# Altium PCB IMU_ld.PcbDoc
Units mil, origin at the board's own origin, x right, y up, seen from the top; angles counter-clockwise.
Board outline 1180.03 x 1210.03 mil, 2 copper layers (Top Layer, Bottom Layer); 19 components, 13 nets, 99 pads, 45 vias.
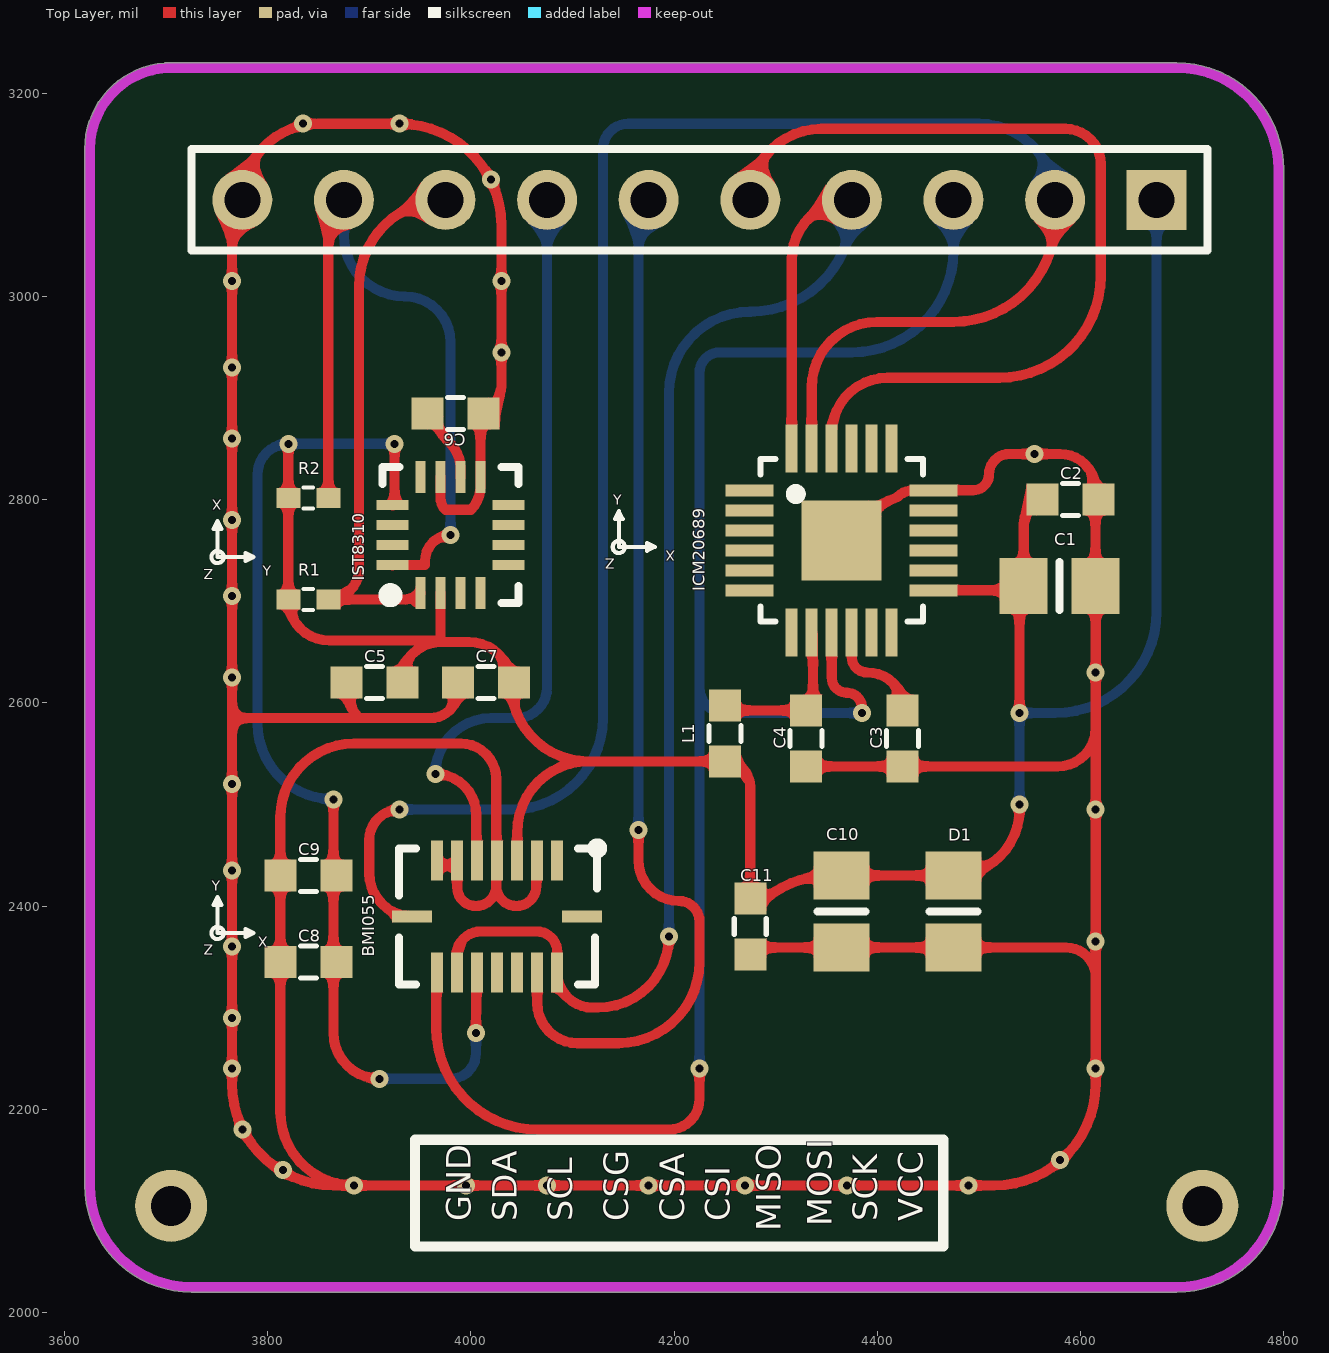
[diagram p0: Top Layer view]
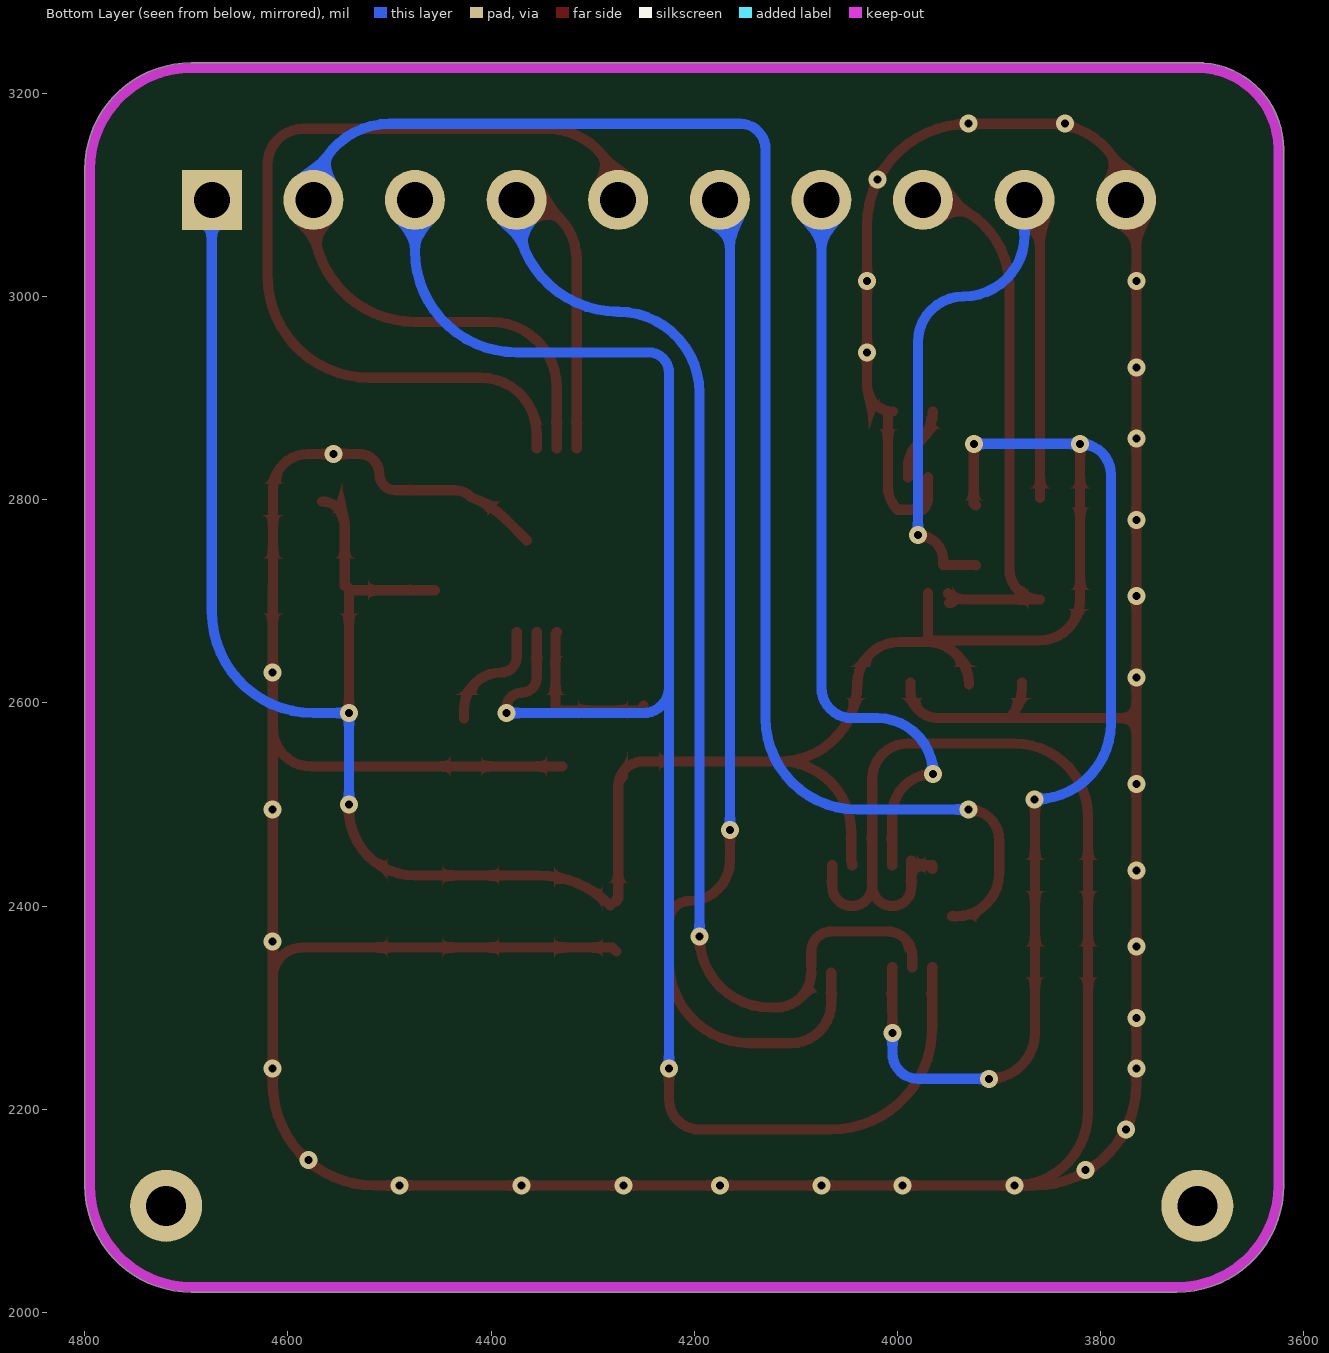
[diagram p1: Bottom Layer view, seen from below]
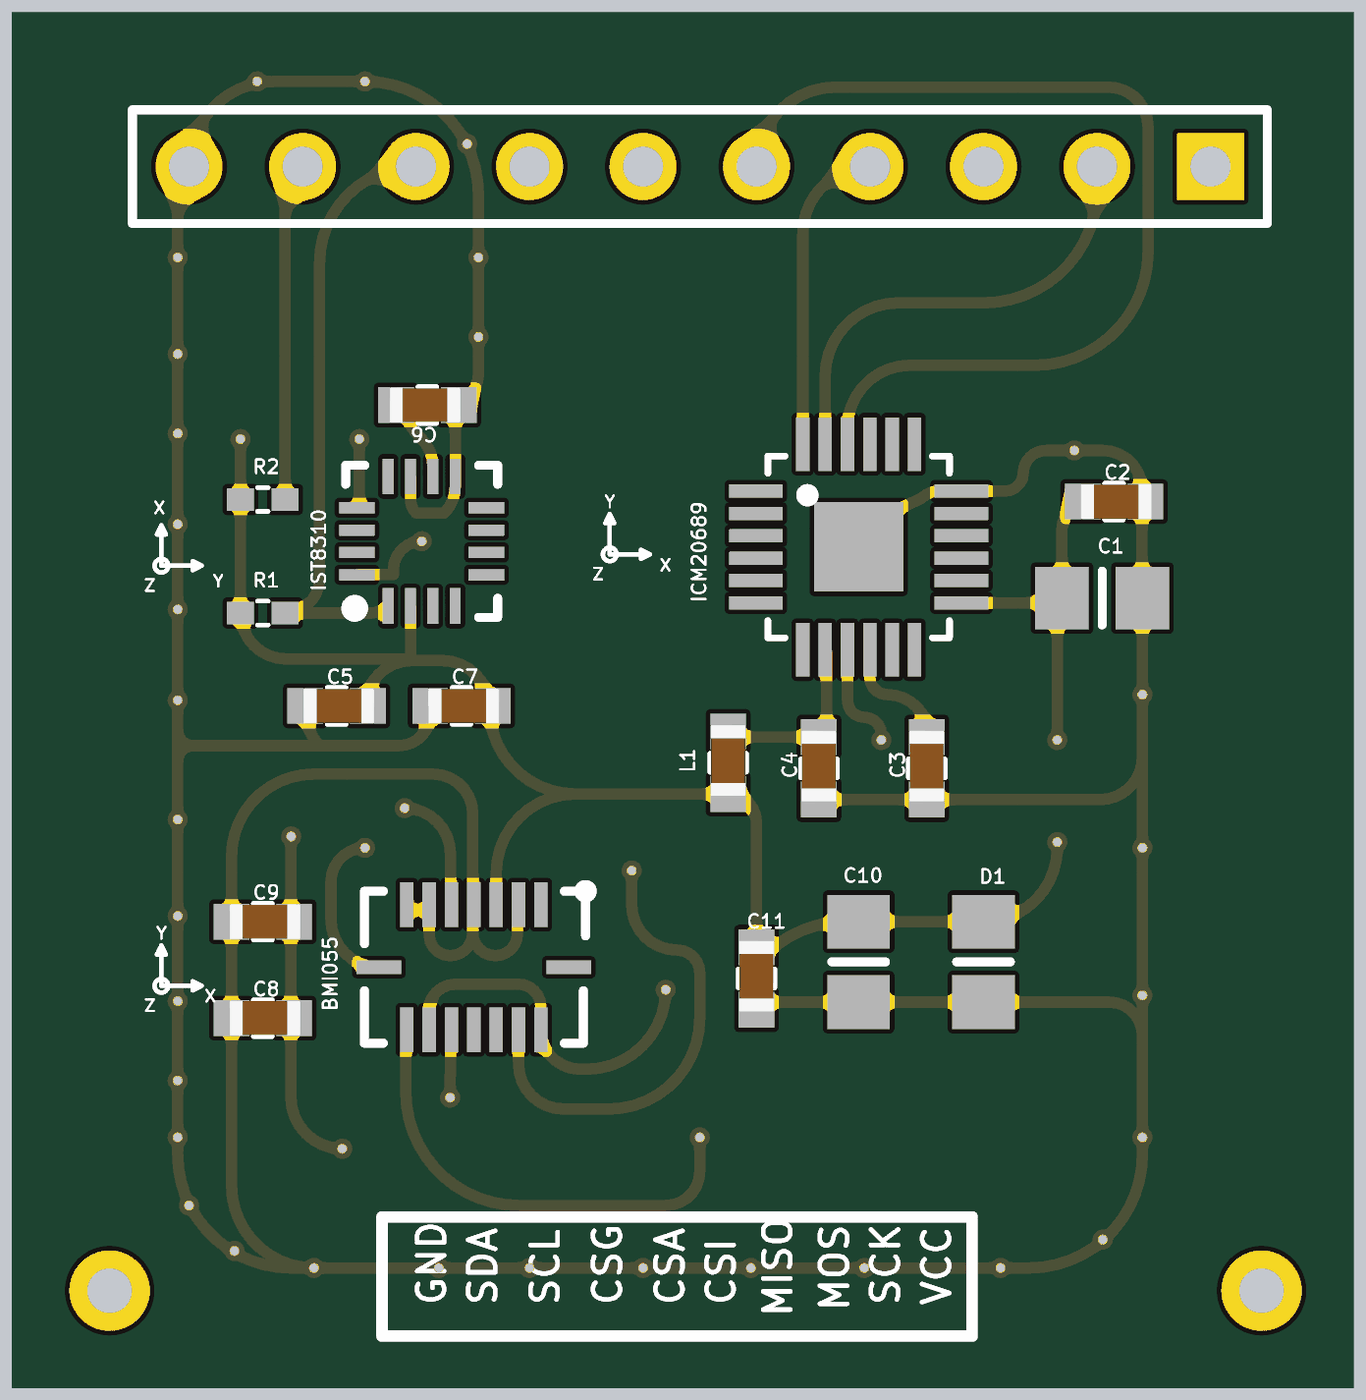
[diagram p2: 3D render of the assembled board from above, using the file's embedded part models]

## Layer stack, top to bottom
Top Solder: solder mask 0.4, Solder Resist, Dk 3.5
Top Layer: signal copper 1.4
Dielectric 1: dielectric 12.6, FR-4, Dk 4.8
Bottom Layer: signal copper 1.4
Bottom Solder: solder mask 0.4, Solder Resist, Dk 3.5

## Board outline
3619.99,2125 3619.99,3145 cw(c3705,3145) 3698.42,3229.76 cw(c3700,3225) 3700,3230.01 4695,3230.01 cw(c4695,3125) 4800.02,3125 4800.02,2125 cw(c4695,2125) 4695,2019.98 3725,2019.98 cw(c3725,2125)

## Design rules (kind name [scope] priority, off if disabled: settings)
Clearance [All] p1: gap=7
PolygonConnect [All] p1: connectstyle=Relief reliefconductorwidth=10 reliefentries=4 polygonreliefangle="90 Angle" airgapwidth=10
RoutingVias [All] p1: holewidth=28 width=50 viastyle="Through Hole" minholewidth=28 minwidth=50 maxholewidth=28 maxwidth=50
SolderMaskExpansion [All] p1: expansion=4
Width [All] p1: maxlimit=10 minlimit=10 preferedwidth=10
30 further rules are at their usual default settings.

## Components (designator, comment, footprint, x,y, rotation, side; value= is the part's Value field where it differs from the comment)
BMI055 "BMI-055" BMI055 4025.94,2389.88 r0 top
C1 "" 0805-CAP 4574.57,2800 r0 top
C2 "" 0603-CAP 4590,2800 r0 top
C3 "" 0603-CAP 4425,2565 r90 top
C4 "" 0603-CAP 4330,2565 r90 top
C5 "" 0603-CAP 3905,2620 r0 top
C6 "" 0603-CAP 3985,2885 r180 top
C7 "" 0603-CAP 4015,2620 r0 top
C8 "" 0603-CAP 3840,2345 r0 top
C9 "" 0603-CAP 3840,2430 r0 top
C10 "" 0805-CAP 4280,2389.57 r90 top
C11 "" 0603-CAP 4275,2380 r90 top
D1 "" 0805-LED 4550,2399.57 r270 top
H1 "Header10*2" HDR1X10 4675,3095 r180 top
ICM20689 "ICM-20689" QFN24 4369.84,2760.55 r0 top (schematic designator U1)
IST8310 "IST8310" IST8310 3980,2765 r90 top
L1 "150RFB" R0603 4250,2570 r90 top
R1 "" 0402-Res 3840,2700 r180 top
R2 "" 0402-Res 3840,2800 r180 top

## Footprints (in the part's own frame and the unit in brackets; to place one, negate y for a bottom-side part, rotate by r counter-clockwise, add the part's x,y. Pads: shape width x height; smd on the part's side, far side on the other; paste and mask are expansions set on the pad)
0402-Res [mm]
  rect 0.6x0.5 smd: 1(-0.5,-0.046) 2(0.5,-0.046)
  silkscreen extent -0.12,-0.31 0.12,0.22, body extent -0.55,-0.3 0.55,0.3, height 0.55
0603-CAP [mm] "0603-CAP"
  rect 0.8x0.8 smd: 1(-0.7,0) 2(0.7,0)
  silkscreen extent -0.2,-0.4 0.2,0.4, body extent -0.75,-0.4 0.85,0.4, height 0.6
0805-CAP [mm]
  rect 1.2x1.4 smd: 1(-0.773,-2.159) 2(1.027,-2.159)
  silkscreen extent 0.13,-2.76 0.13,-1.56, body extent -0.95,-2.86 1.2,-1.46, height 0.7
0805-LED [mm]
  rect 1.2x1.4 smd: 1(-0.773,-1.905) 2(1.027,-1.905)
  silkscreen extent 0.13,-2.5 0.13,-1.31, body extent -0.95,-2.61 1.2,-1.2, height 0.7
BMI055 [mm] "QFN, 16-Leads, Body 4.50x3.00mm, Pitch 0.50mm, Thermal Pad 3.28x0.25mm, IPC Medium Density"
  rect 0.3x1 smd: 1(1.5,1.4) 2(1,1.4) 3(0.5,1.4) 4(0,1.4) 5(-0.5,1.4) 6(-1,1.4) 7(-1.5,1.4) 9(-1.5,-1.4) 10(-1,-1.4) 11(-0.5,-1.4) 12(0,-1.4) 13(0.5,-1.4) 14(1,-1.4) 15(1.5,-1.4)
  rect 1x0.3 smd: 8(-2.125,0) 16(2.125,0)
  silkscreen extent -2.45,-1.7 2.63,1.82, body extent -2.3,-1.55 2.3,1.55, height 1
HDR1X10 [mm] "Connector; Header; 10 Position"
  rect 1.5x1.5 hole 0.9: 1(0,0)
  round 1.5 hole 0.9: 2(2.54,0) 3(5.08,0) 4(7.62,0) 5(10.16,0) 6(12.7,0) 7(15.24,0) 8(17.78,0) 9(20.32,0) 10(22.86,0)
  silkscreen extent -1.27,-1.27 24.13,1.27
IST8310 [mm] "QFN, 16-Leads, Body 3.00x3.00mm, Pitch 0.50mm, Thermal Pad 1.75x1.75mm, IPC Medium Density"
  rect 0.8x0.25 smd: 1(-1.45,0.75) 2(-1.45,0.25) 3(-1.45,-0.25) 4(-1.45,-0.75) 9(1.45,-0.75) 10(1.45,-0.25) 11(1.45,0.25) 12(1.45,0.75)
  rect 0.25x0.8 smd: 5(-0.75,-1.45) 6(-0.25,-1.45) 7(0.25,-1.45) 8(0.75,-1.45) 13(0.75,1.45) 14(0.25,1.45) 15(-0.25,1.45) 16(-0.75,1.45)
  silkscreen extent -1.7,-1.7 1.7,1.7, body extent -1.55,-1.55 1.55,1.55, height 1
QFN24 [mm]
  rect 1.2x0.3 smd: 1(-2.423,1.236) 2(-2.423,0.736) 3(-2.423,0.236) 4(-2.423,-0.264) 5(-2.423,-0.764) 6(-2.423,-1.264) 13(2.177,-1.264) 14(2.177,-0.764) 15(2.177,-0.264) 16(2.177,0.236) 17(2.177,0.736) 18(2.177,1.236)
  rect 0.3x1.2 smd: 7(-1.373,-2.314) 8(-0.873,-2.314) 9(-0.373,-2.314) 10(0.127,-2.314) 11(0.627,-2.314) 12(1.127,-2.314) 19(1.127,2.286) 20(0.627,2.286) 21(0.127,2.286) 22(-0.373,2.286) 23(-0.873,2.286) 24(-1.373,2.286)
  rect 2x2 smd: 18(-0.123,-0.014)
  silkscreen extent -2.15,-2.05 1.91,2.02
R0603 [mm] "R0603"
  rect 0.8x0.8 smd: 1(-0.7,0) 2(0.7,0)
  silkscreen extent -0.2,-0.4 0.2,0.4, body extent -0.75,-0.4 0.85,0.4, height 0.6

## Part data
C1 C2 C3 C4 C5 C6 C7 C8 C9 C10 C11: library part "Cap Semi", "Capacitor (Semiconductor SIM Model)"
D1: library part LED2, "Typical RED, GREEN, YELLOW, AMBER GaAs LED"
L1: library part inductors
R1 R2: library part Res3, "Resistor"

## Free pads (board coordinates)
  round 70.87 hole 39.37: 1(3705,2105) 2(4720,2105)

## Via types
v1: diameter 17.72, hole 7.87, Top Layer to Bottom Layer, tented both sides, 45 vias

## Nets (pads, with @x,y where several pads share a name; then routed paths per layer and width w, separated by ;. In a path a pad name is that pad's centre, name@x,y a point inside that pad or via, vN(x,y) a via of type N, cw(c..) or ccw(c..) an arc to the next point about the centre after c; other vN are vias at no path point)
CS_ACCEL: BMI055.14 H1.6 | length 1048
  Top Layer w10: BMI055.14 4065.32,2304.68 ccw(c4105,2304.68) 4105,2265 4145,2265 ccw(c4145,2345) 4225,2345 4225,2385 ccw(c4205,2385) 4205,2405 cw(c4205,2445) 4165,2445 v1(4165,2475)
  Bottom Layer w10: v1(4165,2475) 4165,3085 cw(c4175,3085) H1.6
CS_GYRO: BMI055.5 H1.7 | length 751.3
  Top Layer w10: v1(3965,2530) cw(c3965,2489.68) 4005.32,2489.68 BMI055.5@4005.32,2440.2
  Bottom Layer w10: v1(3965,2530) cw(c4020,2530) 4020,2585 4045,2585 ccw(c4045,2615) 4075,2615 H1.7
CS_ICM: H1.5 ICM20689.22 | length 882.7
  Top Layer w10: H1.5 cw(c4345,3095) 4345,3165 4585,3165 cw(c4585,3130) 4620,3130 4620,3020 cw(c4520,3020) 4520,2920 4410.16,2920 ccw(c4410.16,2865) 4355.16,2865 ICM20689.22
GND: BMI055.2 BMI055.4 BMI055.6 BMI055.7 C1.2 C2.2 C3.1 C4.1 C5.1 C6.1 C7.1 C8.1 C9.1 C10.1 C11.1 D1.2 H1.10 ICM20689.18 IST8310.9 IST8310.11 | length 5365.9
  Top Layer w10: C5.1 3877.44,2615.32 ccw(c3920.32,2615.32) 3890,2585 ; BMI055.7@3965.94,2436.42 3965.94,2440.2 BMI055.6@3985.63,2440.2 ; IST8310.11 3970.16,2801.69 ccw(c3986.69,2801.69) 3975,2790 4000,2790 ccw(c3977,2813) 4009.53,2813 IST8310.9 C6.1@4009.53,2887.27 ; BMI055.6 3986.57,2418.43 ccw(c4005,2418.43) 4005,2400 ccw(c4005,2420) 4025,2420 ; C7.1 3987.44,2612.44 cw(c3960,2612.44) 3960,2585 3890,2585 ; C6.1@4004.68,2886.81 ccw(c4004.68,2912.13) C6.1@4009.53,2887.27 ; BMI055.2@4064.37,2440.2 4064.37,2419.37 cw(c4045,2419.37) 4045,2400 cw(c4045,2420) 4025,2420 ; C11.1@4276.81,2355.32 4280.62,2359.13 C10.1 D1.2 4585.87,2359.13 cw(c4585.87,2330) 4615,2330 ; C4.1 C3.1 4577.44,2537.44 ccw(c4577.44,2575) 4615,2575 ; ICM20689.18@4365,2760 4384.98,2779.98 cw(c4455.55,2709.41) 4419.93,2802.64 cw(c4435.8,2786.77) 4435.8,2809.21 4455.55,2809.21 4494.21,2809.21 ccw(c4494.21,2825) 4510,2825 cw(c4530,2825) 4530,2845 v1(4555,2845) 4580,2845 cw(c4580,2810.31) 4614.69,2810.31 4614.69,2715 C1.2 v1(4615,2630) 4615,2575 ; 3765,2585 v1(3765,2625) v1(3765,2705) v1(3765,2780) v1(3765,2860) v1(3765,2930) v1(3765,3015) 3765,3085 cw(c3775,3085) H1.10 cw(c3850,3095) 3850,3170 v1(3930,3170) cw(c3930,3070) 4030,3070 v1(4030,3015) v1(4030,2945) 4030,2912.13 cw(c4004.68,2912.13) C6.1@4009.53,2887.27 ; 3765,2585 v1(3765,2520) v1(3765,2435) v1(3765,2360) v1(3765,2290) v1(3765,2240) 3765,2225 ccw(c3865,2225) 3865,2125 v1(3885,2125) ; 3765,2585 3890,2585 ; v1(3885,2125) cw(c3885,2197.56) 3812.44,2197.56 C8.1 C9.1 3812.44,2487.44 cw(c3885,2487.44) 3885,2560 3990,2560 cw(c3990,2525) 4025,2525 4025,2420 ; v1(3885,2125) v1(3995,2125) v1(4075,2125) v1(4175,2125) v1(4270,2125) v1(4370,2125) v1(4490,2125) 4515,2125 ccw(c4515,2225) 4615,2225 v1(4615,2240) 4615,2330 ; 4615,2330 v1(4615,2365) v1(4615,2495) 4615,2575
  other v1: 3815,2140 4580,2150 3775,2180 4020,3115 3835,3170
MISO: BMI055.10 BMI055.15 H1.4 ICM20689.24 | length 1420.6
  Top Layer w10: BMI055.10@3985.63,2339.8 3985.63,2350.63 cw(c4010,2350.63) 4010,2375 4065,2375 cw(c4065,2355) 4085,2355 BMI055.15@4085,2340.75 ; BMI055.15 ccw(c4119.76,2334.76) 4119.76,2300 4125,2300 ccw(c4125,2370) v1(4195,2370) ; ICM20689.24 4315.79,3035.79 cw(c4375,3035.79) H1.4
  Bottom Layer w10: v1@4195,2375 4195,2905 cw(c4275,2905) 4275,2985 ccw(c4275,3085) 4375,3085 H1.4
MOSI: BMI055.9 H1.3 ICM20689.9 | length 1742.3
  Top Layer w10: BMI055.9@3965.94,2339.8 3965.94,2280 ccw(c4065.94,2280) 4065.94,2180 4195,2180 ccw(c4195,2210) 4225,2210 v1(4225,2240) ; ICM20689.9 4355.16,2624.84 ccw(c4370,2624.84) 4370,2610 cw(c4370,2595) v1@4385,2595
  Bottom Layer w10: v1(4225,2240) 4225,2615 ; v1(4385,2590) 4250,2590 cw(c4250,2615) 4225,2615 ; H1.3 4475,3045 cw(c4375,3045) 4375,2945 4245,2945 ccw(c4245,2925) 4225,2925 4225,2615
NetC3_2: C3.2 ICM20689.10 | length 114.4
  Top Layer w10: ICM20689.10 4374.84,2645.16 ccw(c4390,2645.16) 4390,2630 cw(c4390,2593.19) 4426.81,2593.19 C3.2@4426.81,2584.69
NetC4_2: C4.2 ICM20689.8 L1.2 | length 160.1
  Top Layer w10: L1.2 ccw(c4255,2597.56) 4255,2592.56 C4.2 ; ICM20689.8 cw(c4332.25,2666.23) 4336.81,2666.23 C4.2@4336.81,2592.56
NetC6_2: C6.2 IST8310.10 | length 71.7
  Top Layer w10: C6.2@3965.31,2886.81 ccw(c4006.63,2886.81) 3977.41,2857.59 3980,2855 cw(c3956.24,2831.24) 3989.84,2831.24 IST8310.10
SCK: BMI055.8 H1.2 ICM20689.23 | length 1874.4
  Top Layer w10: v1(3930,2495) ccw(c3930,2465) 3900,2465 3900,2432.17 ccw(c3942.28,2432.17) BMI055.8 ; BMI055.8@3945,2390 BMI055.8@3946.26,2390 ; ICM20689.23 4335.47,2910.47 cw(c4400,2910.47) 4400,2975 4475,2975 ccw(c4475,3075) 4575,3075 H1.2
  Bottom Layer w10: v1(3930,2495) 4040,2495 ccw(c4040,2585) 4130,2585 4130,3145 cw(c4155,3145) 4155,3170 4500,3170 cw(c4500,3095) H1.2
SCL: H1.8 IST8310.1 R1.1 | length 556.1
  Top Layer w10: 3945,2700 ccw(c3949.21,2704.21) IST8310.1@3949.21,2698.26 ; IST8310.1 cw(c3935.73,2722.66) 3935.73,2701.81 R1.1 ccw(c3859.68,2732.13) 3890,2732.13 3890,3010 cw(c3975,3010) H1.8
SDA: H1.9 IST8310.16 R2.1 | length 767.8
  Top Layer w10: R2.1 3859.68,3079.68 cw(c3875,3079.68) H1.9 ; IST8310.16 3922.91,2735.66 3955,2735.66 3955,2740 cw(c3980,2740) v1(3980,2765)
  Bottom Layer w10: H1.9 3875,3060 ccw(c3935,3060) 3935,3000 cw(c3935,2955) 3980,2955 v1(3980,2765)
VCC: BMI055.3 BMI055.11 C1.1 C2.1 C5.2 C7.2 C8.2 C9.2 C10.2 C11.2 D1.1 H1.1 ICM20689.13 IST8310.2 IST8310.13 L1.1 R1.2 R2.2 | length 3451.6
  Top Layer w10: v1(3820.31,2855) R2.2 R1.2 ccw(c3860.78,2701.81) 3860.78,2661.34 3970.16,2661.34 ; v1(3865,2505) 3864.69,2505 3864.69,2430 3864.69,2275.31 ccw(c3910,2275.31) v1(3910,2230) ; IST8310.13 ccw(c3922.91,2796.61) 3925,2796.61 v1(3925,2855) ; C5.2@3929.69,2618.19 cw(c3971.5,2618.19) 3971.5,2660 ; IST8310.2 3970.16,2661.34 ; v1(4005,2275) 4005,2294.68 4005.32,2294.68 BMI055.11@4005.32,2339.8 ; BMI055.3@4044.69,2440.2 BMI055.3@4044.69,2442.44 ; BMI055.3 4045.63,2472.63 cw(c4115.44,2472.63) 4115.44,2542.44 ; C11.2 4275,2517.44 ccw(c4250,2517.44) L1.1 4115.44,2542.44 ; C11.2@4276.81,2404.69 C11.2@4276.81,2407.56 ; C11.2@4282.83,2400.71 cw(c4353.54,2330) 4353.54,2430 C10.2 D1.1 ccw(c4475,2495) 4540,2495 v1(4540,2500) ; ICM20689.13 4539.92,2710.79 ccw(c4539.92,2715) C1.1@4540,2710.79 ; v1(4540,2590) C1.1@4540,2710.79 ; C2.1@4566.52,2798.19 ccw(c4566.52,2775.8) 4544.13,2775.8 C1.1 ccw(c4544.13,2710.87) 4540,2710.87 C1.1@4540,2710.79 ; 3970.16,2661.34 ccw(c3971.5,2661.34) 3971.5,2660 ; 3971.5,2660 3997.88,2660 cw(c3997.88,2618.19) 4039.69,2618.19 ccw(c4115.44,2618.19) 4115.44,2542.44
  Bottom Layer w10: v1(3865,2505) cw(c3865,2580) 3790,2580 3790,2824.69 cw(c3820.31,2824.69) v1(3820.31,2855) v1(3925,2855) ; v1(3910,2230) 3980,2230 ccw(c3980,2255) 4005,2255 v1(4005,2275) ; v1(4540,2500) v1(4540,2590) 4575,2590 ccw(c4575,2690) 4675,2690 H1.1
pads on no net: BMI055.1 BMI055.12 BMI055.13 BMI055.16 ICM20689.1 ICM20689.2 ICM20689.3 ICM20689.4 ICM20689.5 ICM20689.6 ICM20689.7 ICM20689.11 ICM20689.12 ICM20689.14 ICM20689.15 ICM20689.16 ICM20689.17 ICM20689.19 ICM20689.20 ICM20689.21 IST8310.3 IST8310.4 IST8310.5 IST8310.6 IST8310.7 IST8310.8 IST8310.12 IST8310.14 IST8310.15

## Keep-outs
Keep-Out Layer:
  lines w10: 3700,3225 4695,3225 cw(c4695,3125) 4795,3125 4795,2125 cw(c4695,2125) 4695,2025 3725,2025 cw(c3725,2125) 3625,2125 3625,3145 cw(c3705,3145) 3705,3225

## Silkscreen, mask and mechanical layers (free items; w line width, h text height)
Top Overlay:
  circle w4: c3750.63,2373.5 r6
  circle w4: c3750.63,2743.5 r6
  circle w4: c4145.63,2753.5 r6
  lines w4: 3750.63,2409 3750.63,2373.5 3786.06,2373.5 ; 3750.63,2409 3746.69,2401.06 3754.57,2401.06 3750.63,2409 ; 3750.63,2779 3750.63,2743.5 3786.06,2743.5 ; 3750.63,2779 3746.69,2771.06 3754.57,2771.06 3750.63,2779 ; 3786.06,2373.5 3778.19,2369.57 3778.19,2377.44 3786.06,2373.5 ; 3786.06,2743.5 3778.19,2739.57 3778.19,2747.44 3786.06,2743.5 ; 4145.63,2789 4149.57,2781.06 4141.69,2781.06 4145.63,2789 ; 4145.63,2789 4145.63,2753.5 4181.06,2753.5 ; 4181.06,2753.5 4173.19,2757.44 4173.19,2749.57 4181.06,2753.5
  lines w10: 3945,2065 3945,2170 4465,2170 4465,2065 3945,2065
  text "X" at 3755,2800 h10.2 r180
  text "Y" at 4140,2795 h10.2
  text "X" at 4201,2749.57 h10.2 r180
  text "Z" at 4141.69,2741.69 h10.2 r180
  text "Z" at 3746.69,2731.69 h10.2 r180
  text "Y" at 3795,2725 h10.2
  text "Y" at 3745,2415 h10.2
  text "X" at 3800,2370 h10.2 r180
  text "Z" at 3746.69,2361.69 h10.2 r180
  text "GND" at 4000,2090 h24 r90
  text "SDA" at 4045,2090 h24 r90
  text "SCL" at 4100,2090 h24 r90
  text "CSG" at 4155,2090 h24 r90
  text "CSA" at 4210,2090 h24 r90
  text "CSI" at 4255,2090 h24 r90
  text "SCK" at 4400,2090 h24 r90
  text "VCC" at 4445,2090 h24 r90
  text "MOSI" at 4355,2085 h24 r90
  text "MISO" at 4305,2080 h24 r90